# Altium PCB SCapacitor2.0_2020-03-19_00-03-24.pcbdoc (part 2 of 2)
Units mm, origin at the board's own origin, x right, y up, seen from the top; angles counter-clockwise.
Board outline 110 x 60 mm, 2 copper layers (Top Layer, Bottom Layer); 200 components, 118 nets, 675 pads, 143 vias.
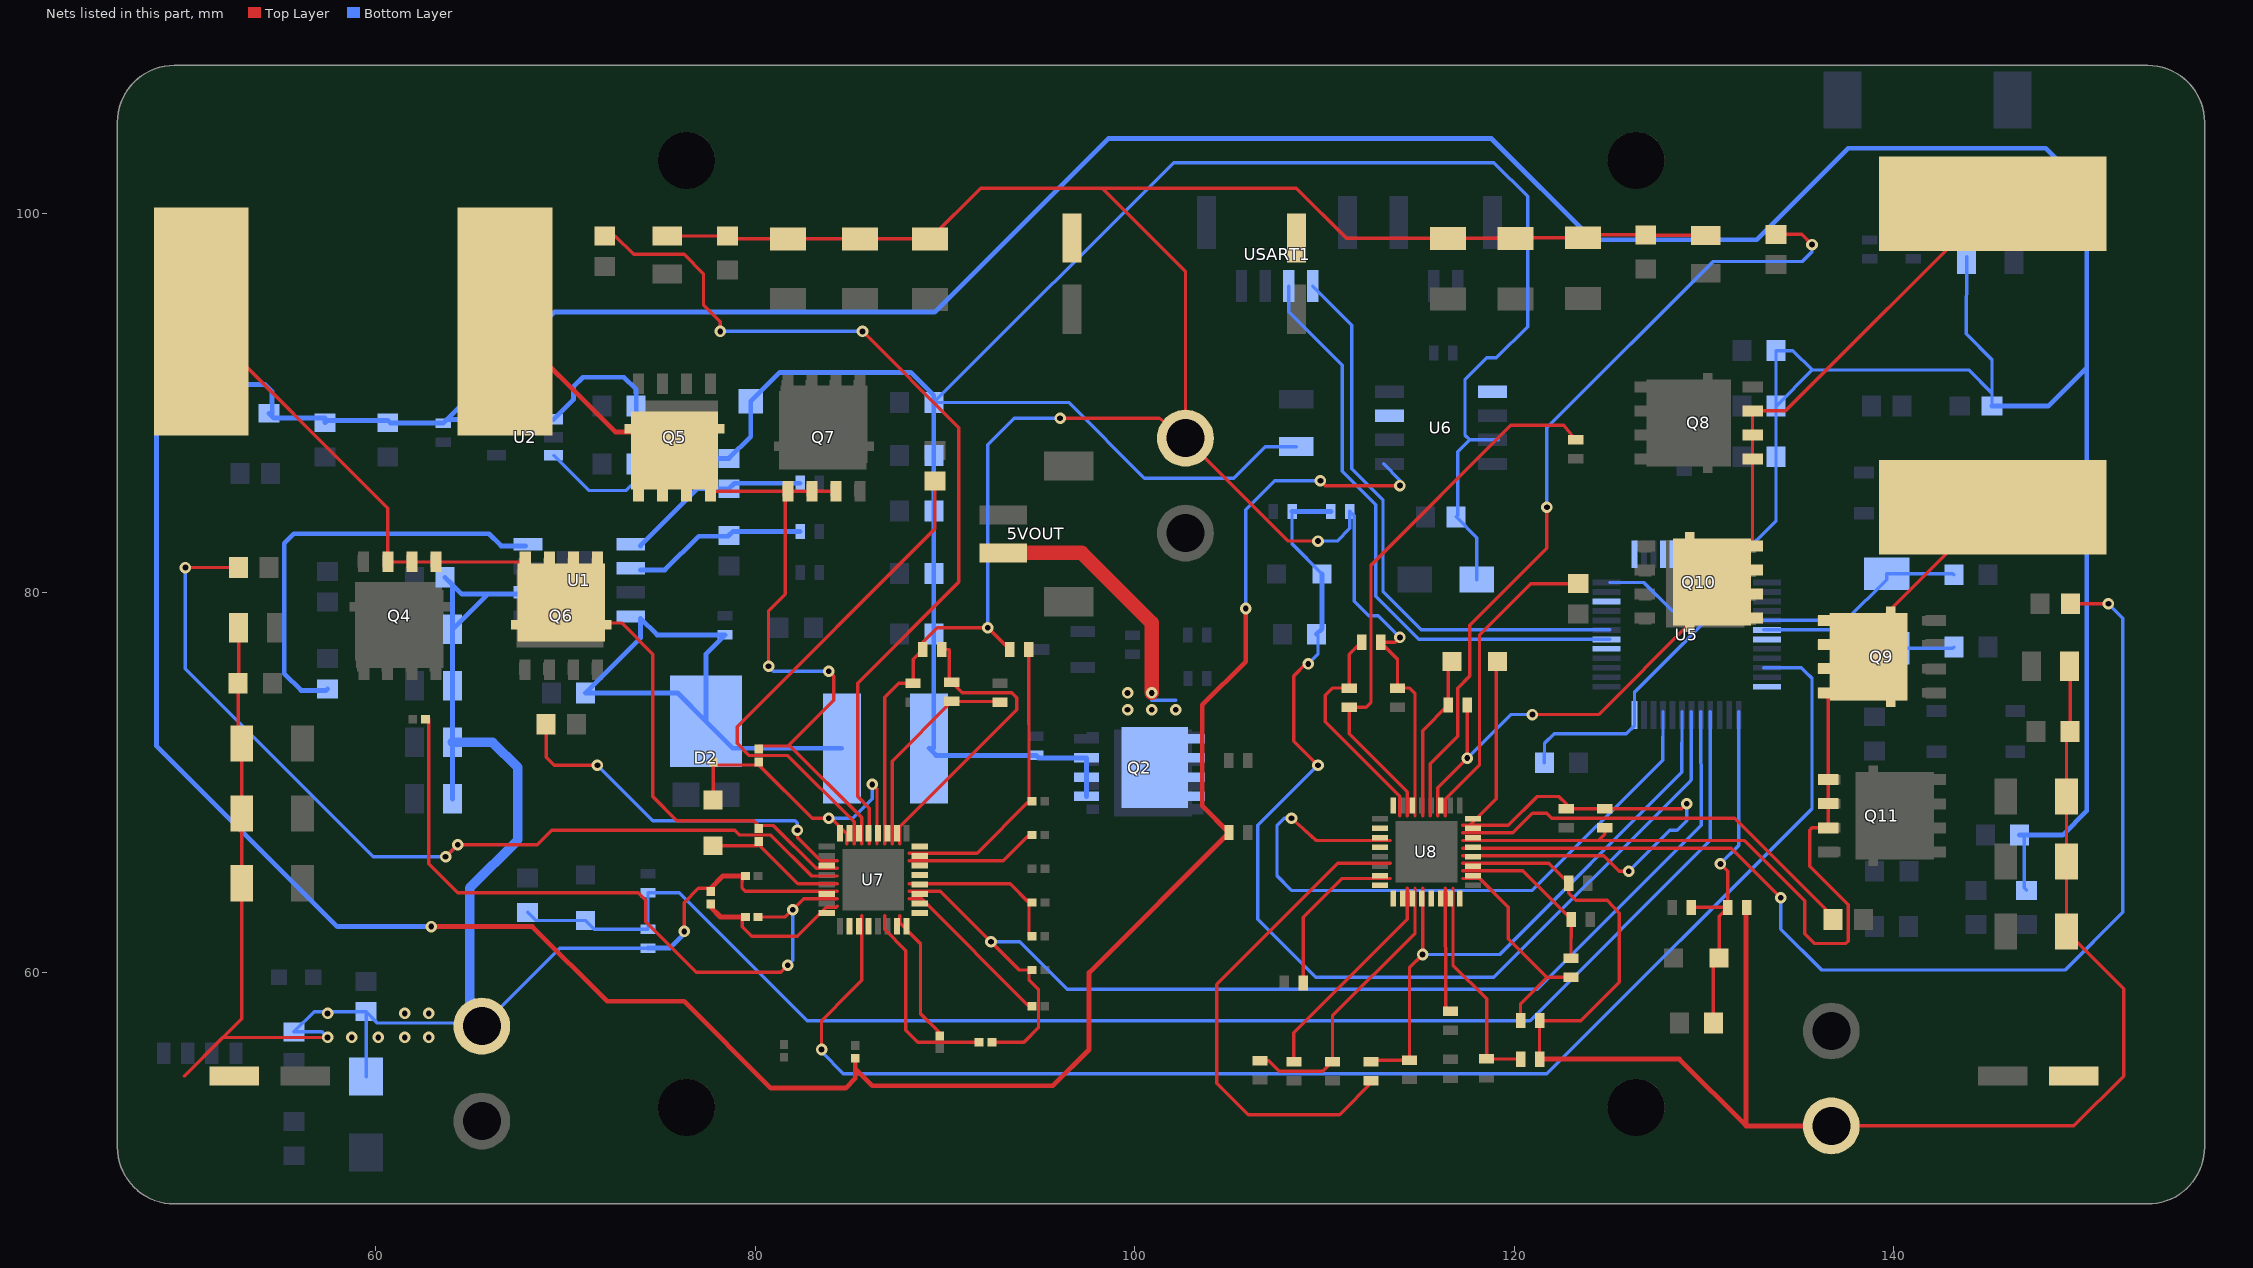
[diagram p2: the nets of this part, all layers, seen from the top]

## Via types
v1: diameter 0.61, hole 0.305, Top Layer to Bottom Layer, 143 vias

## Nets (pads, with @x,y where several pads share a name; then routed paths per layer and width w, separated by ;. In a path a pad name is that pad's centre, name@x,y a point inside that pad or via, vN(x,y) a via of type N, cw(c..) or ccw(c..) an arc to the next point about the centre after c; other vN are vias at no path point) (continued)
U1_4: R7.2 U1.4 | length 22.7
  Bottom Layer w0.254: R7.2@57.471,74.928 57.382,74.839 56.074,74.839 55.185,75.728 55.185,82.586 55.693,83.094 65.98,83.094 66.615,82.459 U1.4@67.91,82.459
U1_5: R1.1 R4.2 U1.5 | length 9.8
  Bottom Layer w0.254: U1.5@73.955,82.459 76.965,85.469 R1.1@78.625,85.469 ; R1.1@78.625,85.469 78.917,85.76 R4.2@82.373,85.76
U1_6: C12.2 R5.2 U1.6 | length 9.3
  Bottom Layer w0.254: U1.6@73.955,81.189 75.251,81.189 77.029,82.967 78.588,82.967 R5.2@78.625,83.005 ; R5.2@78.625,83.005 78.841,83.221 C12.2@82.373,83.221
U1_8: C1.2 D2.3 L1.1 R2.1 U1.8 | length 29.7
  Bottom Layer w0.254: L1.1@84.572,71.791 78.835,71.791 D2.3@77.41,73.216 ; D2.3@77.41,73.216 75.914,74.712 C1.2@71.072,74.712 73.956,77.596 73.956,78.649 74.836,77.768 R2.1@78.425,77.767 77.41,76.752 D2.3@77.41,73.216
U5_5: C24.2 U5.5 X1.1 | length 11.3
  Bottom Layer w0.178: 133.149,78.529 137.488,78.529 139.64,80.681 X1.1@139.64,80.99 143.131,80.99 C24.2@143.187,80.935
U5_6: C25.2 U5.6 X1.2 | length 10.5
  Bottom Layer w0.178: 133.149,78.029 137.72,78.029 138.679,77.069 X1.2@139.641,77.069 143.131,77.069 C25.2@143.187,77.125
U7_6: RILIM1.1 U7.6 | length 10.4
  Top Layer w0.178: 86.828,62.959 86.828,62.245 87.951,61.123 87.951,56.932 88.586,56.297 RILIM1.1@91.642,56.297
U7_8: R32.2 U7.8 | length 7
  Top Layer w0.178: 87.629,62.96 87.629,62.588 88.721,61.496 88.721,57.805 R32.2@89.729,56.797
U7_10: R34.2 U7.10 | length 8.7
  Top Layer w0.178: 88.129,63.86 88.778,63.86 R34.2@94.436,58.202
U7_12: C54.2 RILIM2.2 U7.12 | length 8.5
  Top Layer w0.178: 88.129,64.66 93.439,64.66 94.436,63.663 RILIM2.2@94.436,61.885
U7_15: R33.2 U7.15 | length 6.9
  Top Layer w0.178: 88.129,65.86 93.077,65.86 R33.2@94.436,67.219
U7_16: RDOWN1.2 RUP1.1 U7.16 | length 15.4
  Top Layer w0.178: 88.129,66.26 91.699,66.26 94.436,68.997 RUP1.1@94.419,76.997
U7_17: C52.2 RSS2N1.1 U7.17 | length 16.2
  Top Layer w0.178: 87.629,66.76 87.629,67.658 93.793,73.823 93.793,74.458 93.539,74.712 90.918,74.712 C52.2@90.371,75.26 ; RSS2N1.1@89.847,76.997 90.237,76.998 90.237,75.392 C52.2@90.372,75.258
U7_18: C52.1 RSS2P1.1 U7.18 | length 11.4
  Top Layer w0.178: 87.229,66.76 87.229,71.117 C52.1@90.371,74.26 92.857,74.259 RSS2P1.1@92.903,74.211
U7_21: R26.2 U7.21 | length 48.5
  Top Layer w0.178: R26.2@72.076,98.786 72.64,98.786 73.6,97.826 76.267,97.826 77.283,96.81 77.283,95.159 78.172,94.27 v1(78.172,93.762) ; v1(85.665,93.762) 90.745,88.682 90.745,80.554 85.411,75.22 85.411,69.251 86.029,68.633 86.029,66.76
  Bottom Layer w0.178: v1(78.172,93.762) v1(85.665,93.762)
U7_22: C50.1 L4.2 Q5.8 Q7.3 U7.22 | length 44.8
  Top Layer w0.178: Q5.8@77.659,85.339 Q7.3@81.728,85.339 81.601,85.212 81.601,79.919 80.712,79.03 v1(80.712,76.109) ; C50.1@80.204,71.91 81.863,71.91 85.63,68.143 85.63,66.759 ; 81.438,85.339 Q7.3@82.998,85.339 Q7.3@84.268,85.339 ; 81.558,71.91 81.72,71.91 84.141,74.331 84.141,75.601 v1(83.887,75.855)
  Top Layer w0.254: L4.2@66.815,94.283 72.635,88.462 Q5.8@75.759,88.462
  Bottom Layer w0.178: v1(80.712,76.109) 80.966,75.855 v1(83.887,75.855)
U7_23: R28.1 U7.23 | length 27.2
  Top Layer w0.178: 85.228,66.759 85.228,67.91 81.728,71.41 79.696,71.41 79.061,72.045 79.061,72.934 89.475,83.348 R28.1@89.475,85.883
U7_26: R27.1 U7.26 | length 19.8
  Top Layer w0.178: R27.1@68.991,73.061 68.99,71.32 69.409,70.902 v1(71.695,70.902) ; v1(82.236,67.473) 82.236,67.092 83.468,65.86 84.329,65.86
  Bottom Layer w0.178: v1(71.695,70.902) 74.616,67.981 82.109,67.981 82.236,67.854 v1(82.236,67.473)
U7_27: C46.2 L4.1 Q4.3 Q6.8 U7.27 | length 51.2
  Top Layer w0.178: L4.1@50.815,94.283 60.646,84.451 Q4.3@60.646,81.61 Q4.3@61.916,81.61 Q4.3@63.186,81.61 Q6.8@67.89,81.61 ; Q6.8@68.647,79.441 Q6.8@71.157,79.441 ; Q6.8@69.79,79.471 70.866,78.395 72.965,78.395 74.616,76.744 74.616,72.934 74.616,69.251 75.886,67.981 79.942,67.981 80.204,67.719 80.974,67.719 83.232,65.461 84.329,65.461
U7_28: R25.1 U7.28 | length 49.1
  Top Layer w0.178: v1(49.978,81.316) R25.1@52.788,81.316 ; v1(63.694,66.076) v1(64.329,66.711) 68.52,66.711 69.282,67.473 78.934,67.473 79.188,67.219 80.839,67.219 82.998,65.06 84.329,65.06
  Bottom Layer w0.178: v1(49.978,81.316) 49.978,75.982 59.884,66.076 v1(63.694,66.076) v1(64.329,66.711)
U7_29: C46.1 D8.2 U7.29 | length 7.4
  Top Layer w0.178: D8.2@77.791,66.654 80.139,66.654 80.204,66.719 82.263,64.66 84.329,64.66
U7_31: C47.1 RSS1N1.1 U7.31 | length 37.2
  Top Layer w0.178: RSS1N1.1@62.796,73.314 62.796,65.704 64.329,64.171 65.853,64.171 73.854,64.171 74.235,63.79 74.235,62.647 76.902,59.98 81.347,59.98 v1(81.728,60.361) ; C47.1@80.323,62.901 81.601,62.901 v1(81.982,63.282) 82.56,63.86 84.329,63.86
  Bottom Layer w0.178: v1(81.728,60.361) 81.982,60.615 v1(81.982,63.282)
U7_32: C47.2 RSS1P1.1 U7.32 | length 8.3
  Top Layer w0.178: C47.2@79.323,62.901 79.323,62.385 79.823,61.885 82.236,61.885 83.76,63.409 84.278,63.409 84.329,63.459
  Top Layer w0.254: RSS1P1.1@77.664,63.417 78.18,62.901 C47.2@79.323,62.901
U8_6: RILIM4.1 U8.6 | length 26.7
  Top Layer w0.178: RILIM4.1@112.589,54.272 110.803,52.487 105.985,52.487 104.334,54.138 104.334,59.345 110.72,65.73 113.483,65.73
U8_8: R42.2 U8.8 | length 8.9
  Top Layer w0.178: R42.2@108.893,59.421 108.893,62.888 110.941,64.93 113.483,64.93
U8_10: R46.2 U8.10 | length 11.6
  Top Layer w0.178: R46.2@108.397,55.272 108.398,56.805 114.382,62.789 114.382,64.43
U8_11: C73.2 RILIM3.2 U8.11 | length 15.2
  Top Layer w0.178: RILIM3.2@106.619,55.323 107.085,55.324 107.636,54.773 109.93,54.773 C73.2@110.43,55.273 110.43,57.694 114.784,62.047 114.784,64.43
U8_15: R45.2 U8.15 | length 6.6
  Top Layer w0.178: 116.383,64.43 116.399,58.202 R45.2@116.652,57.939
U8_16: RDOWN2.2 RUP2.1 U8.16 | length 11.6
  Top Layer w0.178: 116.783,64.43 116.783,60.358 118.558,58.583 RDOWN2.2@118.553,55.418 ; RDOWN2.2@118.554,55.417 120.334,55.418 RUP2.1@120.345,55.407 RUP2.1@120.293,55.408
U8_17: C72.2 RSS2N2.1 U8.17 | length 13
  Top Layer w0.178: 117.283,64.93 118.18,64.93 119.701,63.409 119.701,61.758 121.725,59.733 C72.2@123.003,59.734 121.741,59.733 120.344,58.336 RSS2N2.1@120.344,57.44
U8_18: C72.1 RSS2P2.1 U8.18 | length 8.8
  Top Layer w0.178: 117.283,65.33 120.455,65.33 RSS2P2.1@123.012,62.773 C72.1@123.003,60.734
U8_21: R36.2 U8.21 | length 58.3
  Top Layer w0.178: 117.283,66.53 131.438,66.53 v1(134.052,63.917) ; R36.2@149.331,79.411 v1(151.324,79.411)
  Bottom Layer w0.178: v1(134.052,63.917) 134.052,62.266 136.211,60.107 149.038,60.107 152.086,63.155 152.086,78.649 v1(151.324,79.411)
U8_22: C70.1 L5.2 Q9.8 Q11.3 U8.22 | length 52.7
  Top Layer w0.178: 117.283,66.929 132.147,66.929 135.322,63.754 135.322,62.012 135.83,61.504 137.481,61.504 137.608,61.631 137.608,63.536 135.576,65.568 135.576,67.473 135.703,67.6 Q11.3@136.551,67.6 Q11.3@136.551,68.87 Q11.3@136.551,70.14 136.551,74.477 Q9.8@138.691,76.617 138.691,77.955 L5.2@145.228,84.492 ; 124.439,66.929 124.781,67.271 C70.1@124.781,67.608
U8_23: R38.1 U8.23 | length 22.4
  Top Layer w0.178: 117.283,67.33 119.94,67.33 120.971,68.362 121.733,68.362 121.987,68.108 131.639,68.108 136.808,62.939 R38.1@136.808,62.774
U8_26: R37.1 U8.26 | length 16.6
  Top Layer w0.178: 116.384,68.23 116.384,69.108 118.177,70.902 118.177,77.76 120.882,80.465 R37.1@123.384,80.465
U8_27: C66.2 L5.1 Q8.3 Q10.8 U8.27 | length 51
  Top Layer w0.178: 115.983,68.23 115.983,69.723 v1(117.534,71.275) C66.2@117.534,74.077 ; v1(120.971,73.569) 124.453,73.569 Q10.8@129.269,78.384 129.269,79.394 Q10.8@130.429,80.554 132.329,82.454 Q10.8@132.569,82.454 Q8.3@132.569,87.031 Q8.3@132.569,88.301 Q8.3@132.569,89.571 134.306,89.571 L5.1@145.228,100.492
  Bottom Layer w0.178: v1(117.534,71.275) 119.828,73.569 v1(120.971,73.569)
U8_28: R35.1 U8.28 | length 43.3
  Top Layer w0.178: 115.584,68.23 115.584,70.975 117.034,72.426 117.034,74.966 117.669,75.601 117.669,78.268 121.733,82.332 v1(121.733,84.491) ; R35.1@133.799,98.88 135.157,98.88 v1(135.703,98.334)
  Bottom Layer w0.178: v1(121.733,84.491) 121.733,88.682 130.496,97.445 135.195,97.445 135.703,97.953 v1(135.703,98.334)
U8_29: C66.1 D9.2 U8.29 | length 8.8
  Top Layer w0.178: 115.183,68.23 115.183,72.726 116.534,74.077 116.534,76.174 D9.2@116.723,76.363
U8_31: C67.1 RSS1N2.1 U8.31 | length 29.7
  Top Layer w0.178: 114.382,68.23 114.382,69.489 111.319,72.553 C67.1@111.319,73.958 112.2,73.957 112.462,74.204 112.462,81.443 119.828,88.809 122.622,88.809 RSS1N2.1@123.257,88.039
U8_32: C67.2 RSS1P2.1 U8.32 | length 12.1
  Top Layer w0.178: RSS1P2.1@111.963,77.378 111.319,76.736 C67.2@111.319,74.958 110.43,74.966 110.049,74.585 110.049,73.188 113.984,69.253 113.984,68.23
USART1_RX: U5.31 USART1.1 | length 30.4
  Bottom Layer w0.178: USART1.1@109.384,96.151 111.446,94.089 111.446,86.523 113.097,84.872 113.097,80.046 115.114,78.029 125.05,78.029
USART1_TX: U5.30 USART1.2 | length 31.5
  Bottom Layer w0.178: USART1.2@108.134,96.151 108.134,94.788 110.938,91.984 110.938,86.396 112.716,84.618 112.716,79.792 114.979,77.528 125.05,77.528
VCAP: C38.1 C43.2 C44.2 C45.2 C51.2 C56.1 C58.2 C59.2 C60.2 C61.2 C68.2 NO1.2 R19.2 RSNS2.2 RSNS3.1 RSS1P2.2 RSS2N1.2 RUP1.2 U7.19 U8.30 VCAP.1 | length 143.5
  Top Layer w0.178: RSNS2.2@75.377,98.785 C43.2@78.553,98.786 ; C43.2@78.554,98.787 78.705,98.636 C45.2@81.728,98.636 C44.2@85.538,98.636 NO1.2@89.221,98.636 91.895,101.31 96.714,101.31 ; 86.829,66.76 86.829,74.478 87.562,75.212 C51.2@88.332,75.212 88.332,76.482 88.848,76.998 88.848,77.387 89.602,78.141 92.277,78.141 RUP1.2@93.42,76.998 ; v1(96.079,89.19) 101.317,89.19 VCAP.1@102.683,88.133 ; v1(109.668,82.713) 108.103,82.713 VCAP.1@102.683,88.133 ; RSS1P2.2@112.962,77.379 113.859,76.482 C68.2@113.859,74.958 114.494,74.966 114.784,74.676 114.784,68.23 ; RSS1P2.2@112.963,77.378 113.732,77.378 v1(113.986,77.633) ; RSNS3.1@130.114,98.826 126.714,98.826 126.687,98.853 123.789,98.853 C58.2@123.638,98.702 120.12,98.702 C59.2@120.082,98.664 C60.2@116.526,98.664 111.171,98.664 108.525,101.31 96.714,101.31 ; 96.714,101.31 98.31,101.31 102.683,96.937 VCAP.1@102.683,88.133
  Bottom Layer w0.178: v1(92.269,78.141) 92.269,87.793 93.666,89.19 v1(96.079,89.19) ; v1(109.668,82.713) 110.684,82.713 111.348,83.376 R19.2@111.347,84.275 111.573,84.049 111.573,79.538 112.335,78.776 112.843,78.776 v1(113.986,77.633)
VCC1: C49.1 C50.2 D8.1 U7.20 U7.24 | length 17.6
  Top Layer w0.178: D8.1@77.791,69.054 77.791,70.91 80.204,70.91 83.006,68.108 v1(83.887,68.108) 84.014,68.108 84.829,67.293 84.829,66.76 ; v1(86.173,69.886) 86.427,69.632 86.427,68.108 86.43,66.761
  Bottom Layer w0.178: v1(83.887,68.108) 85.157,68.108 86.173,69.124 v1(86.173,69.886)
VCC2: C69.1 C70.2 D9.1 U8.20 U8.24 | length 36.7
  Top Layer w0.178: 117.283,66.13 124.727,66.13 125.543,65.314 v1(126.051,65.314) ; D9.1@119.123,76.363 119.066,76.306 119.066,69.124 117.672,67.73 117.283,67.73 119.704,67.729 121.225,69.251 122.368,69.251 122.749,68.87 C69.1@122.749,68.608 C70.2@124.781,68.608 128.837,68.608 v1(129.099,68.87)
  Bottom Layer w0.178: v1(126.051,65.314) 128.21,67.473 128.591,67.473 129.099,67.981 v1(129.099,68.87)
VCC5OUT1: 5VOUT.1 Q2.5 Q2.6 Q2.7 Q2.8 | length 14.3
  Top Layer w0.762: 5VOUT.1@93.084,82.094 97.207,82.093 100.905,78.395 v1(100.905,74.712)
  Bottom Layer w0.178: 100.905,74.331 102.175,74.331
  other v1: 99.635,73.823 100.905,73.823 102.175,73.823 99.635,74.712
VCC-3.3: C17.2 C18.2 C19.2 C26.2 C27.1 C28.2 C29.2 C32.2 L2.1 LEDB1.1 LEDG1.1 R31.1 R41.1 U2.5 U3.1 U5.24 U5.36 U5.48 U6.5 | length 343.6
  Top Layer w0.178: v1(109.795,85.888) 110.049,85.634 v1(113.986,85.634)
  Top Layer w0.254: v1(62.932,62.393) 68.266,62.393 72.203,58.456 72.33,58.456 76.267,58.456 80.839,53.884 84.776,53.884 85.283,54.39 R31.1@85.283,55.288 ; R31.1@85.284,55.288 85.284,54.9 86.173,54.011 88.078,54.011 95.698,54.011 97.603,55.916 97.603,59.972 R41.1@104.978,67.345 103.572,68.751 103.572,74.077 105.858,76.363 v1(105.858,79.157)
  Bottom Layer w0.178: v1(105.858,79.157) 105.858,84.364 107.382,85.888 v1(109.795,85.888) ; 113.123,86.777 113.986,85.914 v1(113.986,85.634) ; C26.2@121.595,71.029 121.606,72.045 122.114,72.553 125.924,72.553 126.348,72.977 126.348,73.729 126.349,74.756 131.849,80.256 131.849,81.829 133.809,83.789 C28.2@133.809,87.158 C29.2@133.809,89.825 ; 125.05,80.528 126.839,80.528 128.337,79.03 130.594,79.001 ; U3.1@143.851,97.699 143.831,93.635 145.19,92.276 LEDB1.1@145.19,89.825 145.19,90.498 143.958,91.73 135.714,91.73 ; C32.2@146.639,67.214 146.883,67.214 146.883,64.43 L2.1@147.01,64.303 ; C29.2@133.809,89.825 C27.1@133.809,92.746 134.698,92.746 135.714,91.73 ; C29.2@133.809,89.825 135.714,91.73
  Bottom Layer w0.254: LEDG1.1@54.385,89.444 54.639,89.19 57.344,89.19 C18.2@57.344,88.946 ; LEDG1.1@54.553,89.276 54.55,90.587 54.169,90.968 50.74,90.968 48.454,88.682 48.454,71.918 57.979,62.393 v1(62.932,62.393) ; C18.2@57.344,88.947 57.471,89.074 60.646,89.074 60.792,88.928 C17.2@63.567,88.928 ; U2.5@66.385,89.124 63.763,89.124 C17.2@63.567,88.928 ; LEDB1.1@145.19,89.825 148.149,89.825 150.181,91.857 ; C32.2@146.64,67.215 148.907,67.215 150.181,68.489 150.181,91.857 ; C17.2@63.567,88.928 69.417,94.778 89.475,94.778 98.619,103.922 118.812,103.922 124.146,98.588 132.782,98.588 137.608,103.414 148.022,103.414 150.181,101.255 150.181,91.857
VCC-5: C2.2 C3.2 C4.2 C5.2 C6.2 C15.2 C16.2 C22.1 C23.1 D1.1 L1.2 Q2.1 Q2.2 Q2.3 R1.2 R10.2 U2.1 U2.3 U4.1 U6.3 | length 149.2
  Bottom Layer w0.178: U2.3@69.385,87.223 71.23,85.38 73.219,85.38 73.74,85.9 C15.2@73.739,86.777 ; C6.2@89.424,90.015 102.06,102.652 118.939,102.652 120.717,100.874 120.717,94.016 119.066,92.365 118.558,92.365 117.415,91.222 117.415,88.301 117.668,88.047 119.168,88.047 ; C6.2@89.424,90.015 96.524,90.015 100.524,86.015 105.223,86.015 106.894,87.686 U4.1@108.525,87.686 ; C23.1@116.945,83.983 117.034,84.072 117.034,87.412 117.669,88.047 119.168,88.047 ; C23.1@116.945,83.983 118.037,82.891 C22.1@118.037,80.681
  Bottom Layer w0.254: U2.1@69.385,89.124 70.425,90.163 70.425,90.841 70.933,91.349 73.092,91.349 73.738,90.703 C16.2@73.739,89.825 ; C15.2@73.739,86.777 74.03,87.069 R1.2@78.625,87.069 79.774,88.217 D1.1@79.774,90.079 81.298,91.603 88.205,91.603 89.423,90.385 C6.2@89.424,90.015 C5.2@89.424,87.221 C4.2@89.424,84.3 C3.2@89.424,80.998 C2.2@89.424,77.823 89.422,71.791 L1.2@89.172,71.791 ; C15.2@73.739,86.777 C16.2@73.739,89.825 ; L1.2@89.172,71.791 89.545,71.418 R10.2@94.808,71.417 94.944,71.283 Q2.3@97.47,71.283 Q2.2@97.47,70.267 Q2.1@97.47,69.251
VILIM1: C53.2 RILIM1.2 U5.17 U7.11 | length 61.9
  Top Layer w0.178: 88.129,64.26 89.767,64.26 92.142,61.885 v1(92.434,61.592) 92.655,61.372 93.92,60.107 94.436,60.107 94.436,59.591 94.936,59.091 94.936,57.059 94.174,56.297 RILIM1.2@92.642,56.297
  Bottom Layer w0.178: v1@92.434,61.593 93.958,61.593 96.46,59.091 121.225,59.091 129.861,67.727 129.861,68.235 129.848,73.729
VILIM2: C74.2 RILIM4.2 U5.19 U8.12 | length 32.4
  Top Layer w0.178: RILIM4.2@112.461,55.272 112.538,55.349 C74.2@114.491,55.349 114.49,60.23 v1(115.183,60.923) ; 115.183,64.43 v1(115.183,60.923) ; v1(115.183,60.923) 115.129,60.869 v1(115.183,60.923)
  Bottom Layer w0.178: v1(115.183,60.923) 119.247,60.923 128.845,70.521 128.85,73.729
VIN: C8.2 C9.2 C10.2 C11.2 C37.1 C39.2 C40.2 C41.2 C42.2 C48.2 D3.2 R3.2 R8.2 R9.2 R20.2 RSNS1.1 RSS1P1.2 U1.2 U7.30 VIN.1 | length 113.1
  Top Layer w0.178: RSNS1.1@52.788,78.141 52.788,75.247 C42.2@52.762,75.22 52.761,72.234 C41.2@52.95,72.045 C40.2@52.95,68.362 C39.2@52.95,64.679 52.95,57.545 49.923,54.519 51.955,56.551 v1(57.471,56.551) ; v1(76.267,62.139) 76.267,63.66 77.019,64.414 RSS1P1.2@77.664,64.417 ; C48.2@79.323,65.06 79.315,64.425 79.48,64.26 84.329,64.26
  Top Layer w0.254: RSS1P1.2@77.664,64.417 78.307,65.06 C48.2@79.323,65.06
  Bottom Layer w0.178: v1(57.471,56.551) 57.179,56.843 R9.2@55.694,56.843 56.76,57.91 R8.2@59.503,57.91 ; D3.2@59.503,54.487 R8.2@59.503,57.91 ; R20.2@74.361,61.257 69.712,61.258 VIN.1@65.599,57.145 65.431,57.313 61.662,57.313 60.1,57.313 R8.2@59.503,57.91
  Bottom Layer w0.254: C10.2@64.058,69.124 C11.2@64.058,72.103 C9.2@64.058,75.082 C8.2@64.058,78.062 ; R20.2@74.361,61.257 75.513,61.258 76.267,62.012 v1(76.267,62.139) ; C8.2@64.058,78.062 65.915,79.919 67.91,79.919 64.548,79.919 R3.2@63.659,80.808 64.059,80.408 C8.2@64.058,78.062
  Bottom Layer w0.508: C11.2@64.057,72.103 66.176,72.103 67.504,70.775 67.504,66.965 64.964,64.425 64.964,57.78 VIN.1@65.599,57.145
  other v1: 58.741,56.551 60.138,56.551 61.535,56.551 62.805,56.551 57.471,57.821 61.535,57.821 62.805,57.821
VOUT: C57.1 C62.2 C63.2 C64.2 C65.2 C71.2 R21.2 RSNS4.2 RSS2N2.2 RUP2.2 U8.19 VOUT.1 | length 88.2
  Top Layer w0.178: 117.283,65.73 121.833,65.73 C71.2@122.884,64.679 122.884,64.163 123.257,63.79 124.903,63.79 125.543,63.104 125.543,59.472 123.511,57.44 121.344,57.44 RUP2.2@121.345,55.408 ; VOUT.1@136.719,51.892 149.502,51.892 152.129,54.519 152.129,59.124 C65.2@149.114,62.139 C64.2@149.114,65.822 C63.2@149.114,69.251 149.114,72.49 C62.2@149.304,72.68 149.304,76.08 RSNS4.2@149.275,76.109
  Top Layer w0.254: RUP2.2@121.344,55.408 128.718,55.408 132.233,51.892 ; R21.2@132.266,63.409 132.233,63.376 132.233,51.892 ; VOUT.1@136.719,51.892 132.233,51.892
VPWM1: U5.10 U7.3 | length 76.1
  Top Layer w0.178: v1(83.506,55.916) 83.506,57.44 84.141,58.075 84.395,58.329 85.63,59.563 85.63,62.959
  Bottom Layer w0.178: v1(83.506,55.916) 83.506,55.789 84.649,54.646 121.733,54.646 135.703,68.616 135.703,75.474 135.322,75.855 135.148,76.029 133.149,76.029
VPWM2: U5.21 U8.3 | length 35.3
  Top Layer w0.178: v1(108.271,68.108) 109.577,66.929 113.483,66.929
  Bottom Layer w0.178: v1(108.271,68.108) 107.89,68.108 107.509,67.727 107.509,65.06 108.271,64.298 120.971,64.298 127.829,71.156 127.849,73.729
VVCAP: C34.2 D5.1 R19.1 R22.2 U5.18 | length 58.8
  Top Layer w0.178: v1(109.16,76.236) 109.033,76.236 108.398,75.601 108.398,72.934 108.398,72.172 v1(109.668,70.902)
  Bottom Layer w0.178: R22.2@108.299,84.275 108.3,82.56 D5.1@109.887,80.973 ; v1(109.16,76.236) 109.668,76.744 109.668,77.716 C34.2@109.587,77.798 ; v1(109.668,70.902) 106.493,67.727 106.493,65.568 106.493,62.774 109.541,59.726 118.939,59.726 129.226,70.013 129.349,70.136 129.349,73.729
  Bottom Layer w0.254: R22.2@108.299,84.275 R19.1@110.347,84.275 ; C34.2@109.588,77.798 109.887,78.098 D5.1@109.887,80.973
VVIN: C35.2 D6.1 R20.1 R23.2 U5.16 | length 78.1
  Bottom Layer w0.178: C35.2@68.012,63.143 68.439,62.717 71.06,62.717 71.519,62.258 R20.1@74.361,62.257 R23.2@74.361,64.178 76.013,64.171 82.744,57.44 120.844,57.44 130.349,66.944 130.349,73.729
VVOUT: C36.2 D7.1 R21.1 R24.2 U5.13 | length 19.2
  Top Layer w0.178: R24.2@129.345,63.409 R21.1@131.267,63.408 130.807,62.949 D7.1@130.807,60.742 130.507,60.442 C36.2@130.508,57.313 ; v1(130.877,65.695) 131.268,65.314 ; R21.1@131.267,63.408 131.268,65.314
  Bottom Layer w0.178: v1(130.877,65.695) 131.849,66.667 131.849,73.729
pads on no net: 5VOUT.0 CN1.0 Designator1.1 Designator1.2 Designator1.3 Designator1.4 Designator1.5 Designator1.6 Designator1.7 Designator1.8 Designator1.9 Designator2.1 Designator2.2 Designator2.3 Designator2.4 Designator2.5 Designator2.6 Designator2.7 Designator2.8 Designator2.9 Designator3.1 Designator3.2 Designator3.3 Designator3.4 Designator3.5 Designator3.6 Designator3.7 Designator3.8 Designator3.9 Designator4.1 Designator4.2 Designator4.3 Designator4.4 Designator4.5 Designator4.6 Designator4.7 Designator4.8 Designator4.9 Designator5.1 Designator5.2 Designator5.3 Designator5.4 Designator5.5 Designator5.6 Designator5.7 Designator5.8 Designator5.9 Designator6.1 Designator6.2 Designator6.3 Designator6.4 Designator6.5 Designator6.6 Designator6.7 Designator6.8 Designator6.9 Designator7.1 Designator7.2 Designator7.3 Designator7.4 Designator7.5 Designator7.6 Designator7.7 Designator7.8 Designator7.9 Designator8.1 Designator8.2 Designator8.3 Designator8.4 Designator8.5 Designator8.6 Designator8.7 Designator8.8 Designator8.9 Designator9.1 Designator9.2 Designator9.3 Designator9.4 Designator9.5 Designator9.6 Designator9.7 Designator9.8 Designator9.9 U2.4 U5.1 U5.2 U5.12 U5.14 U5.15 U5.20 U5.38 U5.39 U5.40 U5.41 U5.42 U5.43 U5.45 U5.46 U7.2 U7.7 U7.9 U7.13 U8.2 U8.7 U8.9 U8.13

## Polygon pours and split planes (outlines as drawn)
GND on Bottom Layer "Bottom Layer-GND" (solid, pour order 36): 46.295,107.732 46.295,47.661 156.531,47.661 156.531,107.859 46.295,107.859
U1_8 on Bottom Layer "Bottom Layer-U1_8" (solid, pour order 26): 72.838,78.522 72.838,78.014 72.584,77.76 71.06,76.236 70.552,75.728 70.552,73.188 71.314,72.426 72.711,72.426 73.346,71.791 73.346,71.156 73.727,70.775 79.315,70.775 79.696,70.775 81.601,68.87 85.411,68.87 85.538,68.997 85.538,74.712 80.839,74.712 79.95,75.601 79.95,76.998 78.934,78.014 77.283,78.014 76.267,79.03 72.838,79.03
VIN on Bottom Layer "Bottom Layer-VIN 1" (solid, pour order 24): 63.313,81.316 64.202,81.316 64.583,81.316 65.472,80.427 68.774,80.427 68.774,79.538 66.234,79.538 65.726,79.03 65.726,74.204 67.758,72.172 67.758,66.965 66.488,65.695 66.488,61.758 67.758,60.488 65.599,60.488 65.091,59.98 64.329,59.98 63.821,60.488 63.821,64.679 65.091,65.949 65.091,67.727 64.075,67.727 63.567,68.235 63.567,78.903
VIN on Bottom Layer "Bottom Layer-VIN" (solid, pour order 0): 65.599,54.773 62.551,54.773 62.424,54.773 61.789,54.138 61.789,53.249 61.027,52.487 58.614,52.487 57.725,53.376 57.725,55.916 57.471,56.17 55.185,56.17 54.931,56.424 54.931,57.44 55.312,57.821 55.566,57.821 56.455,58.71 61.916,58.71 62.043,58.71 63.821,60.488 67.377,60.488 67.758,60.488 69.536,58.71 69.536,56.551 67.758,54.773 67.631,54.773
VCC-5 on Bottom Layer "Bottom Layer-VCC-5" (solid, pour order 28): 88.205,68.87 88.967,68.108 97.73,68.108 98.238,68.616 98.238,71.537 94.428,71.537 92.904,71.537 91.761,72.68 91.761,76.363 90.999,77.125 90.999,90.46 90.999,90.841 89.856,91.984 70.044,91.984 68.901,90.841 68.901,88.936 69.917,88.936 70.044,88.936 70.679,89.571 70.679,90.46 71.187,90.968 72.711,90.968 72.838,90.841 72.838,90.714 73.219,90.333 73.219,86.015 73.092,85.888 72.965,85.888 72.711,85.634 71.441,85.634 70.171,86.904 70.171,87.285 69.917,87.539 68.901,87.539 68.901,86.396 70.679,84.618 73.981,84.618 75.759,86.396 79.569,86.396 81.347,88.174 81.347,90.333 82.236,91.222 88.332,91.222 88.332,91.095 88.84,90.587 88.84,76.744 88.205,76.109 88.205,74.585
VCC5OUT1 on Bottom Layer "Bottom Layer-VCC5OUT1" (solid, pour order 30): 99.635,70.521 99.508,70.902 98.619,71.664 98.619,74.839 99.127,75.347 100.397,75.347 100.651,75.093 101.667,75.093 101.921,74.839 102.175,74.839 102.556,74.458 102.556,73.95 102.937,73.569 103.445,73.569 103.826,73.188 103.826,68.743 103.699,68.616 101.794,68.616 101.667,68.743
VCC-3.3 on Bottom Layer "Bottom Layer-VCC-3.3" (solid, pour order 34): 53.915,89.952 53.915,90.714 54.296,91.095 65.599,91.095 66.107,90.587 66.742,89.952 66.869,89.952 66.996,89.825 66.996,88.936 66.869,88.809 65.853,88.809 64.075,88.809 63.948,88.682 61.281,88.682 61.154,88.555 58.106,88.555 57.979,88.428 54.423,88.428 53.915,88.936
GND on Top Layer "Top Layer-GND" (solid, pour order 38): 46.295,107.859 46.295,47.661 156.531,47.661 156.531,107.859 46.295,107.859
VOUT on Top Layer "Top Layer-VOUT" (solid, pour order 22): 148.657,77.252 148.657,77.379 149.165,77.887 152.721,77.887 153.737,76.871 153.737,51.598 151.578,49.439 133.163,49.439 132.147,50.328 132.147,52.995 133.544,54.392 138.37,54.392 139.386,53.376 139.767,52.995 147.133,52.995 147.895,53.757 147.895,56.805 147.514,57.186 147.514,70.521 147.514,70.648 148.403,71.537 148.784,71.918
VCAP on Top Layer "Top Layer-VCAP" (solid, pour order 12): 73.727,99.35 78.426,104.049 81.601,104.049 110.938,104.049 124.019,104.049 126.305,104.049 127.067,104.049 128.21,104.049 132.02,100.239 132.02,99.477 132.02,98.461 131.512,97.953 131.385,97.953 128.591,97.953 128.21,98.334 127.575,98.334 125.924,98.334 124.781,97.191 115.256,97.191 105.985,97.191 105.35,96.556 105.35,95.032 105.35,86.904 104.207,85.761 101.032,85.761 99.889,86.904 99.762,86.904 99.889,87.031 99.889,96.556 99.254,97.191 94.428,97.191 94.301,97.064 80.585,97.064 79.823,97.826 79.823,97.953 79.569,98.207 79.188,98.207 76.521,98.207 73.981,98.207 73.727,98.461 73.727,98.588 73.727,98.842
VIN on Top Layer "Top Layer-VIN" (solid, pour order 2): 48.327,55.281 48.327,76.871 51.121,79.665 53.28,79.665 53.788,79.157 53.788,73.696 54.423,73.061 54.423,68.997 54.169,68.743 54.423,68.997 54.423,60.488 56.328,58.583 61.916,58.583 63.694,60.361 66.996,60.361 68.393,58.964 68.393,56.043 67.123,54.773 64.075,54.773 63.059,55.789 55.185,55.789 53.28,53.884 53.28,52.741 52.772,52.233 49.724,52.233 48.2,53.757
RSNS1_2 on Top Layer "Top Layer-RSNS1_2" (solid, pour order 4): 54.042,76.998 54.042,79.157 54.55,79.665 57.598,79.665 58.36,80.427 64.456,80.427 65.345,79.538 65.345,75.601 64.456,74.712 62.678,74.712 62.297,74.331 62.17,74.204 62.17,72.807 61.916,72.553 59.122,72.553 58.741,72.934 58.741,75.093 56.963,76.871 54.169,76.871
U7_27 on Top Layer "Top Layer-U7_27" (solid, pour order 6): 48.327,100.366 48.327,101.636 50.613,103.922 56.582,103.922 58.36,102.144 58.36,88.809 60.646,86.523 61.408,85.761 69.79,85.761 72.838,82.713 73.727,82.713 74.362,82.078 74.362,78.141 73.6,77.379 66.361,77.379 65.599,78.141 65.599,79.665 64.837,80.427 64.583,80.681 60.265,80.681 60.011,80.935 60.011,82.459 59.63,82.84 50.867,82.84 48.327,85.38
U7_22 on Top Layer "Top Layer-U7_22" (solid, pour order 8): 58.741,102.144 58.741,89.063 61.535,86.269 69.917,86.269 72.457,83.729 73.092,83.094 84.268,83.094 84.903,83.729 84.903,86.015 84.649,86.396 79.823,86.396 79.442,86.777 79.442,89.571 78.934,90.079 73.219,90.079 72.584,90.714 72.584,93 71.441,94.143 70.933,94.651 70.933,102.144 69.155,103.922 60.392,103.922 60.392,103.795
RSNS2_1 on Top Layer "Top Layer-RSNS2_1" (solid, pour order 10): 74.489,97.318 73.6,96.429 73.6,93.889 74.489,93 74.489,91.857 74.489,90.841 74.87,90.46 77.918,90.46 80.204,92.746 80.204,93.508 79.95,93.762 79.188,93.762 78.68,93.254 77.791,93.254 77.41,93.635 77.41,94.397 76.902,94.905 76.902,95.413 76.902,96.556 76.14,97.318
RSNS3_2 on Top Layer "Top Layer-RSNS3_2" (solid, pour order 14): 129.226,97.254 128.718,96.746 128.591,96.746 128.464,96.619 128.464,95.603 127.194,94.333 126.94,94.333 125.035,92.428 125.035,88.364 124.019,87.348 123.765,87.348 123.638,87.221 122.876,87.221 122.749,87.094 122.749,86.586 124.019,86.269 129.607,86.269 130.877,86.269 131.131,86.269 131.131,97.254
U8_27 on Top Layer "Top Layer-U8_27" (solid, pour order 16): 132.02,89.825 131.385,89.19 131.385,85.507 130.623,84.745 128.972,84.745 128.337,84.11 128.337,78.268 128.337,77.506 129.48,76.363 132.528,76.363 134.433,78.268 134.433,79.284 136.211,81.062 136.211,83.094 136.211,87.285 140.402,91.476 140.402,93.127 141.418,94.524 151.959,94.524 152.467,94.524 153.61,94.524 153.737,94.651 153.737,102.779 151.324,105.192 139.64,105.192 136.719,102.271 136.719,97.318 136.338,96.937 134.941,95.921 134.814,95.794 134.814,91.222 133.417,89.825 133.163,89.825
U8_22 on Top Layer "Top Layer-U8_22" (solid, pour order 18): 152.213,92.111 141.672,92.111 136.592,87.031 136.592,81.062 134.814,79.284 134.814,78.268 134.687,78.141 134.687,68.997 134.687,68.235 135.576,67.346 137.1,67.346 137.1,70.648 138.878,72.426 140.402,72.426 140.783,72.807 140.783,73.442 140.783,79.03 142.688,80.935 147.133,80.935 151.705,80.935 153.737,82.967 153.737,90.46
RSNS4_1 on Top Layer "Top Layer-RSNS4_1" (solid, pour order 20): 141.228,77.442 141.609,77.823 145.165,77.823 147.197,77.823 147.705,77.315 147.705,76.68 147.705,74.902 147.705,74.648 147.197,74.14 146.562,74.14 144.911,74.14 144.403,73.632 143.895,73.632 142.625,72.362 141.355,72.362 140.72,72.997 140.72,77.061
VCC5OUT1 on Top Layer "Top Layer-VCC5OUT1" (solid, pour order 32): 100.524,75.474 100.397,75.347 99.127,75.347 98.619,74.839 98.619,73.569 99.254,72.934 102.175,72.934 102.683,73.442 102.683,73.823 102.302,74.204 101.921,74.585 101.921,74.966 101.286,75.601

## Keep-outs
Keep-Out Layer:
  the board outline again, w0.178

## Silkscreen, mask and mechanical layers (free items; w line width, h text height)
Top Overlay:
  text "SC2.0" at 61.408,104.239 h1.14
Bottom Overlay:
  text "SWDIO" at 137.608,98.905 h1.14
  text "SWCLK" at 143.577,98.905 h1.14
  text "GND" at 147.133,98.905 h1.14
  text "3.3V" at 151.324,98.905 h1.14
  text "P" at 115.574,95.413 h1.14 r90
  text "N" at 119.638,95.413 h1.14 r90
  text "5V" at 105.922,95.032 h1.14 r90
  text "GND" at 107.827,95.032 h1.14 r90
  text "TX" at 109.605,95.032 h1.14 r90
  text "RX" at 111.383,95.032 h1.14 r90